# Altium PCB Table Clock.PcbDoc
Units mm, origin at the board's own origin, x right, y up, seen from the top; angles counter-clockwise.
Board outline 80.01 x 59.69 mm, 2 copper layers (Top Layer, Bottom Layer); 41 components, 32 nets, 181 pads, 19 vias.
Unrouted connection lines stored in the file: 57.
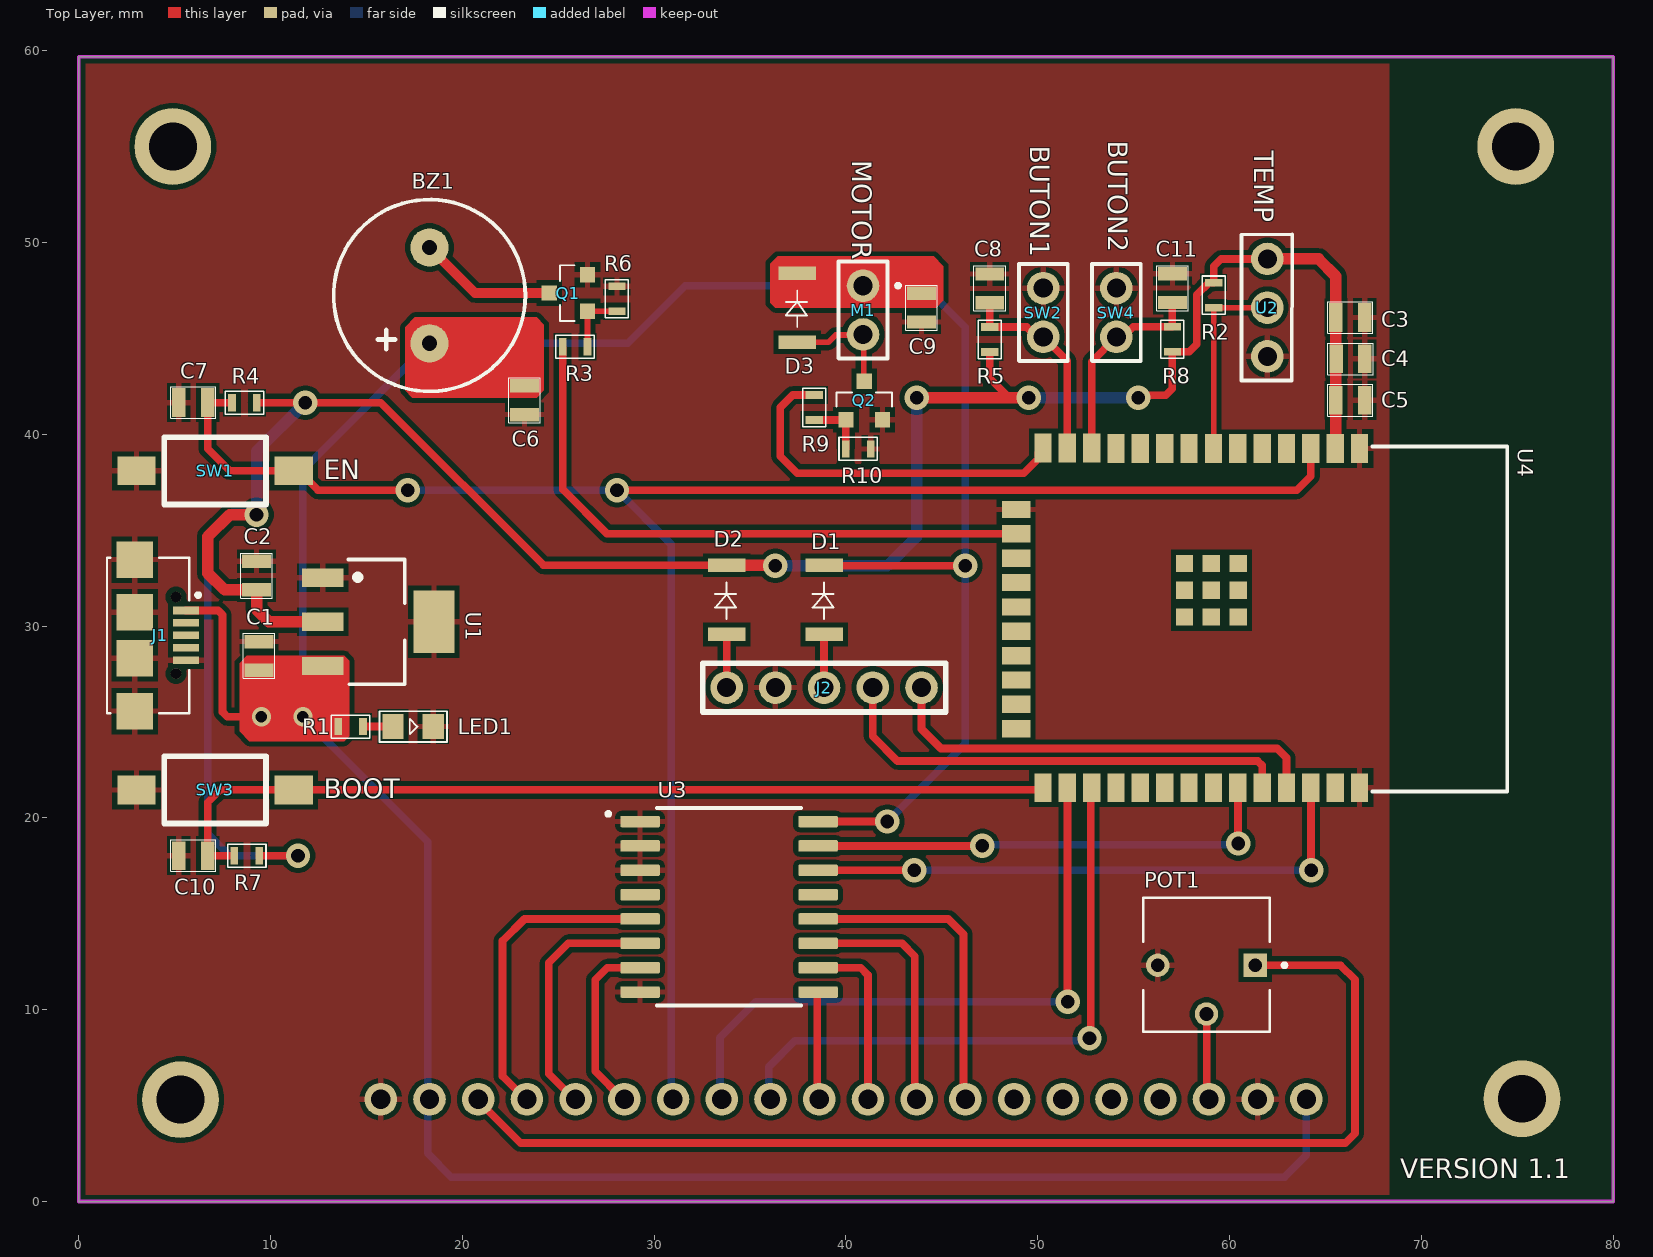
[diagram p0: Top Layer view]
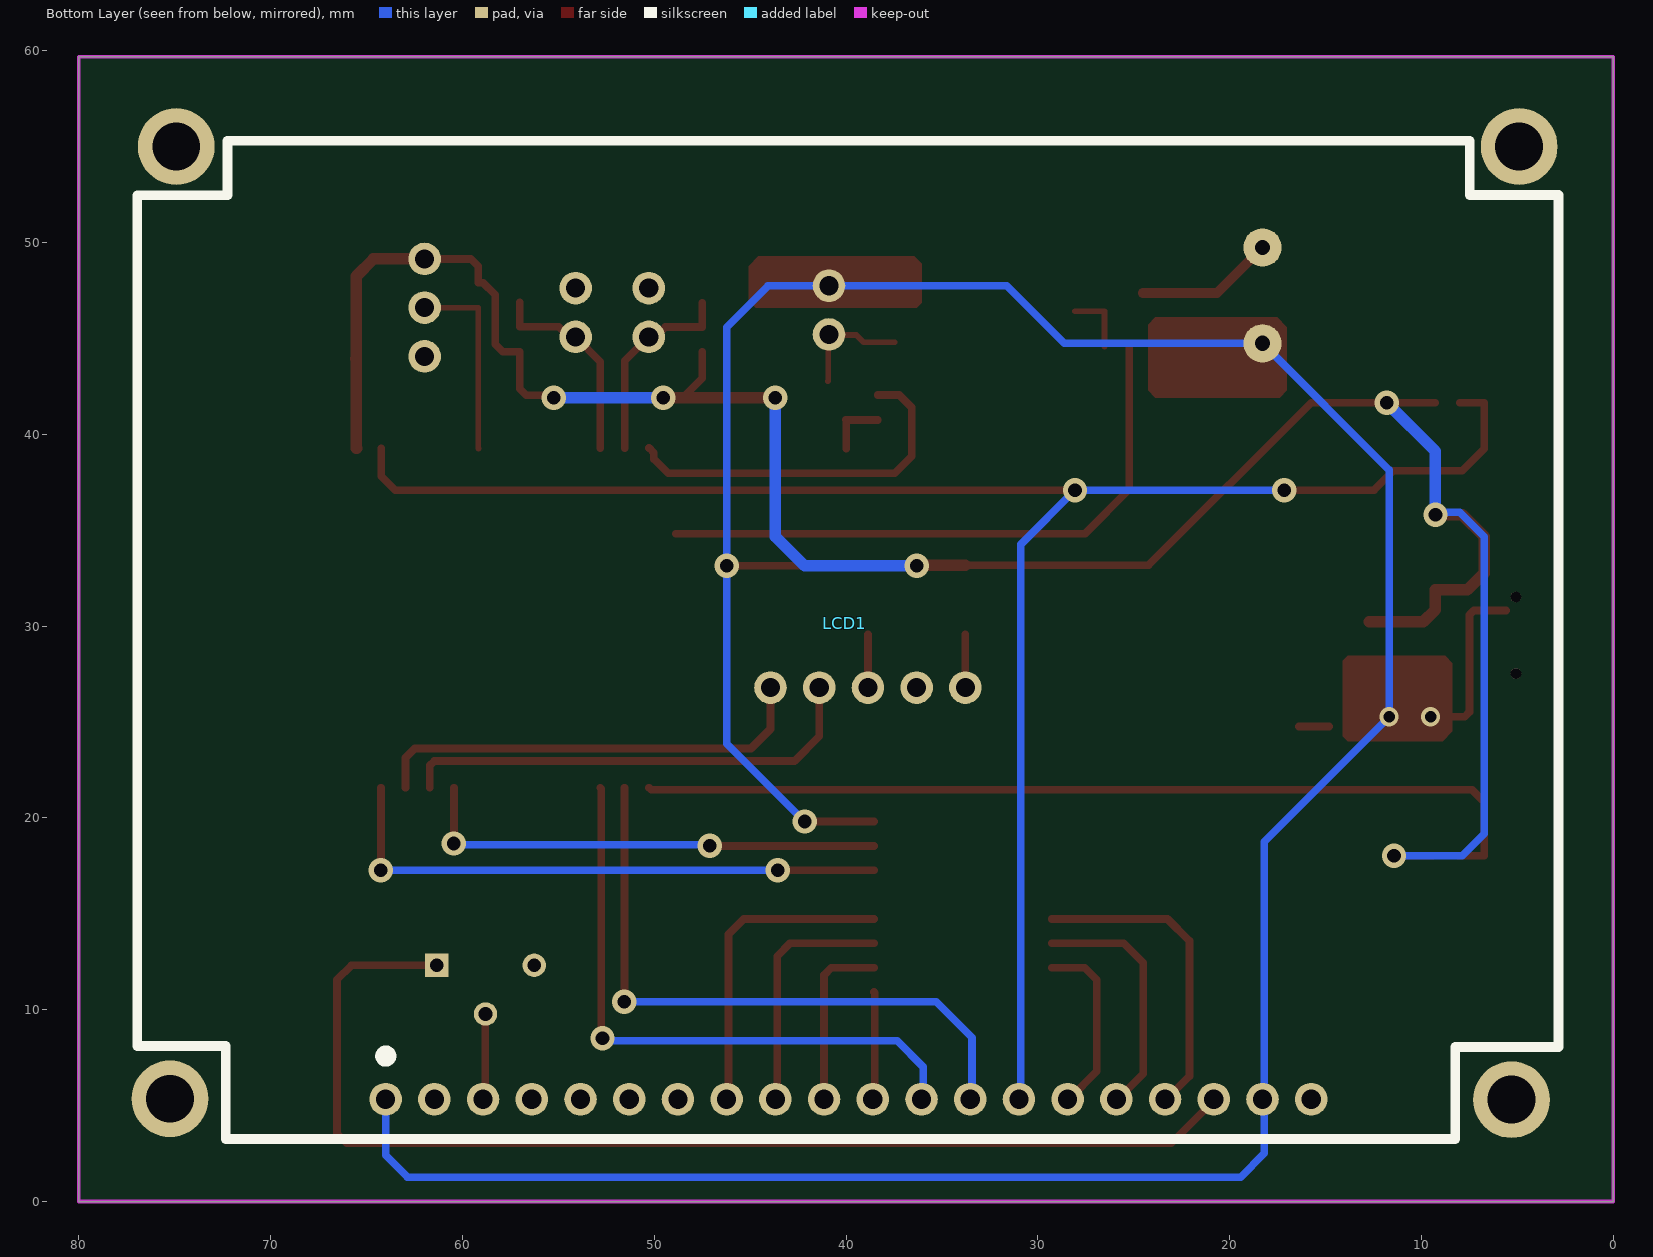
[diagram p1: Bottom Layer view, seen from below]
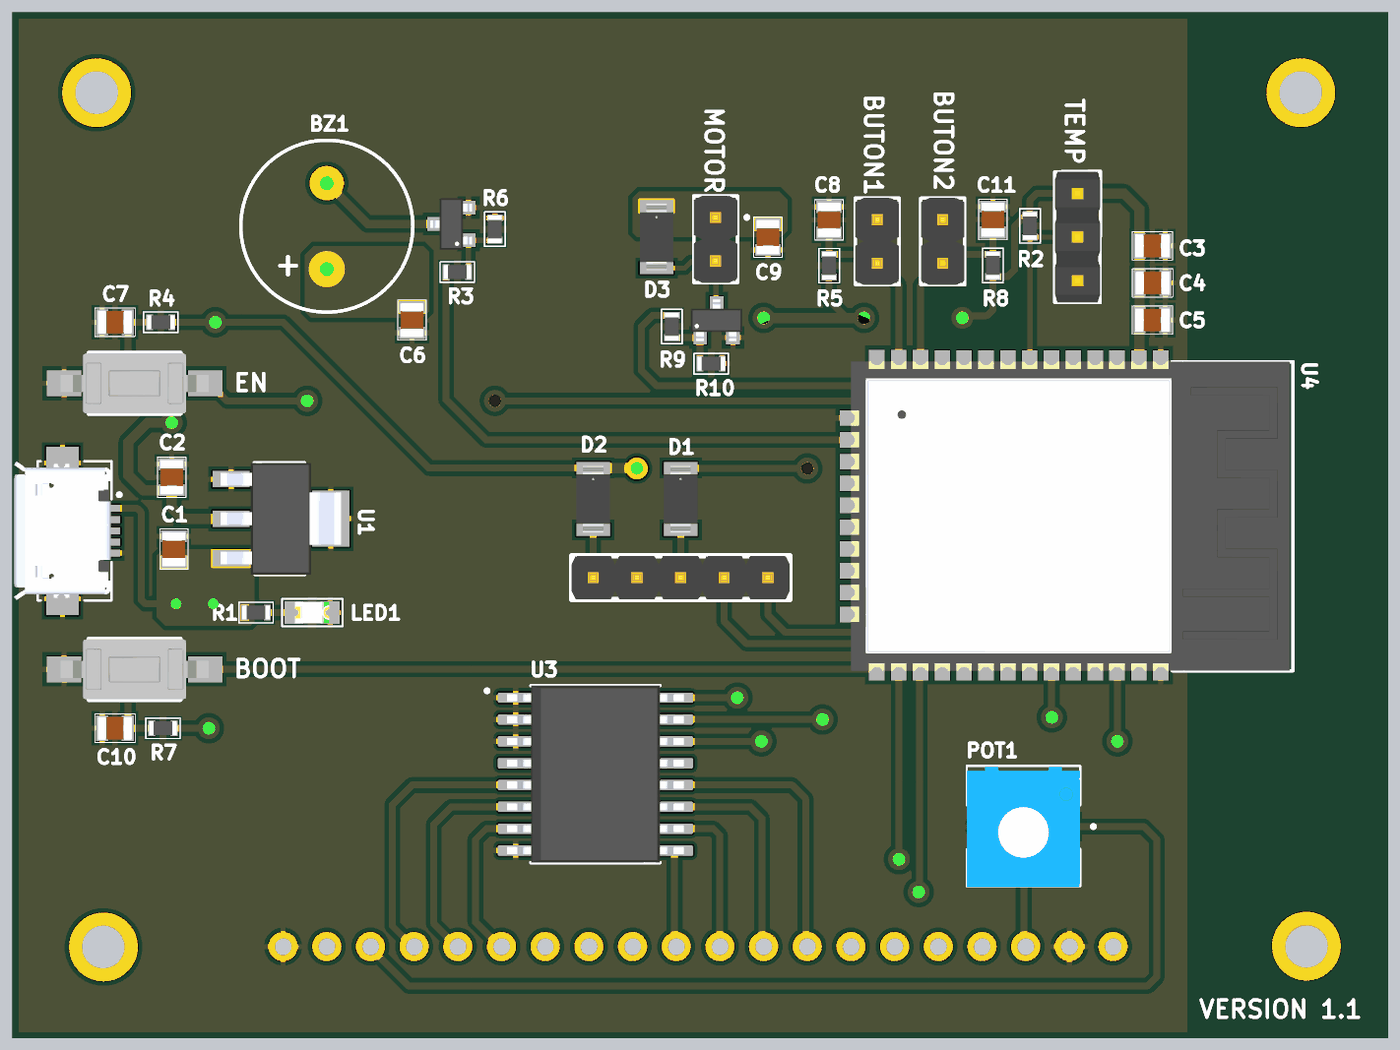
[diagram p2: 3D render of the assembled board from above, using the file's embedded part models]

## Layer stack, top to bottom
Top Solder: solder mask 0.0102, Solder Resist, Dk 3.5
Top Layer: signal copper 0.0356
Dielectric 1: dielectric 0.32, FR-4, Dk 4.8
Bottom Layer: signal copper 0.0356
Bottom Solder: solder mask 0.0102, Solder Resist, Dk 3.5

## Board outline
0,0 80.01,0 80.01,59.69 0,59.69

## Design rules (kind name [scope] priority, off if disabled: settings)
Clearance [All] p1: gap=0.254 ignorepadtopadclearanceinfootprint=FALSE except(0: Arc-SMDPad Arc-Hole Track-SMDPad Track-Hole SMDPad-SMDPad SMDPad-THPad SMDPad-Hole THPad-Hole Via-Hole Fill-Hole Poly-Hole Region-Hole Text-Hole)
PolygonConnect [All] p1: connectstyle=Relief reliefconductorwidth=0.254 reliefentries=4 polygonreliefangle="90 Angle" airgapwidth=0.254
RoutingVias [All] p1: holewidth=0.711 width=1.27 viastyle="Through Hole" minholewidth=0.711 minwidth=1.27 maxholewidth=0.711 maxwidth=1.27
SolderMaskExpansion [All] p1: expansion=0.102 istentingtop=FALSE
Width [All] p1: maxlimit=15 minlimit=0.2 preferedwidth=0.5 minimp=50.000000 maximp=50.000000 favimp=50.000000
30 further rules are at their usual default settings.

## Components (designator, comment, footprint, x,y, rotation, side; value= is the part's Value field where it differs from the comment)
BZ1 "CMI-9605IC-0580T" BUZZER 18.288,47.244 r180 top
C1 "GRM21BR61E226ME44L" "CAP 0805" 9.398,28.448 r270 top value=22uF
C2 "GRM21BR61E226ME44L" "CAP 0805" 9.271,32.639 r270 top value=22uF
C3 "CC0805KKX5R8BB106" "CAP 0805" 66.297,46.098 r180 top value=10uF
C4 "CC0805KKX7R9BB105" "CAP 0805" 66.309,43.939 r180 top value=1uF
C5 "CC0805KRX7R9BB104" "CAP 0805" 66.297,41.78 r180 top value=0.1uF
C6 "CC0805KRX7R9BB104" "CAP 0805" 23.241,41.783 r90 top value=0.1uF
C7 "CC0805KRX7R9BB104" "CAP 0805" 5.969,41.656 r0 top value=0.1uF
C8 "CC0805KRX7R9BB104" "CAP 0805" 47.498,47.613 r270 top value=0.1uF
C9 "CC0805KRX7R9BB104" "CAP 0805" 43.942,46.609 r90 top value=0.1uF
C10 "CC0805KRX7R9BB104" "CAP 0805" 5.969,18.034 r180 top value=0.1uF
C11 "CC0805KRX7R9BB104" "CAP 0805" 57.023,47.625 r270 top value=0.1uF
D1 "MBR230LSFT1G" DIODE 38.862,31.369 r90 top
D2 "MBR230LSFT1G" DIODE 33.782,31.369 r90 top
D3 "MBR230LSFT1G" DIODE 37.465,46.609 r90 top
J1 "UJ2-MIBH-G-SMT-TR" "MICRO USB" 4.259,29.521 r270 top
J2 "61300511121" "HEADER 5 POS" 38.862,26.797 r180 top
LCD1 "NHD-12864WG-BTFH-V#N" "LCD SCREEN" 39.878,5.334 r180 bottom
LED1 "150080RS75000" "LED 0805" 17.349,24.765 r0 top
M1 "HD-EM1003-LW15-R" Motor 40.894,46.482 r270 top
POT1 "3362P-1-103LF" TRIMMER 58.801,12.319 r180 top value=10K
Q1 "SS8050-G" SOT23-3 25.527,47.371 r90 top
Q2 "SS8050-G" SOT23-3 40.955,41.767 r0 top
R1 "CRGH0603J2K0" "RES 0603" 14.174,24.765 r180 top value=2K
R2 "CRGH0603J4K7" "RES 0603" 59.182,47.259 r270 top value=4K7
R3 "CRGH0603J100R" "RES 0603" 25.878,44.576 r0 top value=100R
R4 "CRGH0603J10K" "RES 0603" 8.636,41.656 r0 top value=10K
R5 "CRGH0603J10K" "RES 0603" 47.498,44.946 r270 top value=10K
R6 "CRGH0603J10K" "RES 0603" 28.062,47.071 r270 top value=10K
R7 "CRGH0603J10K" "RES 0603" 8.763,18.034 r0 top value=10K
R8 "CRGH0603J10K" "RES 0603" 57.023,44.958 r270 top value=10K
R9 "CRGH0603J2K0" "RES 0603" 38.354,41.402 r270 top value=2K
R10 "CRGH0603J10K" "RES 0603" 40.64,39.243 r180 top value=10K
SW1 "PTS636SM43SMTR LFS" BUTTON 7.112,38.1 r0 top
SW2 "PTS636SM50 LFS" "HEADER 2 POS" 50.292,46.355 r270 top
SW3 "PTS636SM43SMTR LFS" BUTTON 7.112,21.463 r0 top
SW4 "PTS636SM50 LFS" "HEADER 2 POS" 54.102,46.355 r270 top
U1 "AMS1117-3.3" "SOT 223" 15.621,30.226 r270 top
U2 "DS18B20" "HEADER 3 POS" 61.976,46.609 r90 top
U3 "PCF8574ADWR" SOIC-16 33.909,15.367 r0 top
U4 "ESP32-WROOM-32E-H4" ESP32 57.831,30.435 r270 top value=ESP32-WROOM

## Footprints (in the part's own frame and the unit in brackets; to place one, negate y for a bottom-side part, rotate by r counter-clockwise, add the part's x,y. Pads: shape width x height; smd on the part's side, far side on the other; paste and mask are expansions set on the pad)
BUTTON [mm]
  rect 2x1.5 smd mask+0.05: 1(-4.1,0) 2(4.1,0)
  silkscreen extent -2.65,-1.75 2.65,1.75, body extent -4.3,-1.75 4.3,1.75, height 4.3
BUZZER [mm]
  round 2 hole 0.8 mask+0.05: 1(0,2.5) 2(0,-2.5)
  silkscreen extent -5,-5 5,5, body extent -4.84,-4.78 4.76,6.3, height 5.16
"CAP 0805" [mm]
  rect 0.7x1.5 smd mask+0.05: 1(-0.75,0) 2(0.75,0)
  silkscreen extent -1.17,-0.82 1.17,0.82, body extent -1,-0.67 1,0.67, height 1.22
DIODE [mm]
  rect 0.7x1.95 smd mask+0.102: 1(-1.8,0) 2(1.8,0)
  silkscreen extent -1,-0.5 0.9,0.6, body extent -1.93,-0.98 1.93,0.98, height 1.4
ESP32 [mm]
  rect 1.5x0.9 smd mask+0.05: 1(-8.834,8.951) 2(-8.834,7.681) 3(-8.834,6.411) 4(-8.834,5.141) 5(-8.834,3.871) 6(-8.834,2.601) 7(-8.834,1.331) 8(-8.834,0.061) 9(-8.834,-1.209) 10(-8.834,-2.479) 11(-8.834,-3.749) 12(-8.859,-5.019) 13(-8.859,-6.289) 14(-8.859,-7.559) 25(8.859,-7.559) 26(8.859,-6.289) 27(8.859,-5.019) 28(8.859,-3.749) 29(8.859,-2.479) 30(8.859,-1.209) 31(8.859,0.061) 32(8.859,1.331) 33(8.859,2.601) 34(8.859,3.871) 35(8.859,5.141) 36(8.859,6.411) 37(8.859,7.681) 38(8.859,8.951)
  rect 0.9x1.5 smd mask+0.05: 15(-5.649,-8.951) 16(-4.379,-8.951) 17(-3.109,-8.951) 18(-1.839,-8.951) 19(-0.569,-8.951) 20(0.701,-8.951) 21(1.971,-8.951) 22(3.241,-8.951) 23(4.511,-8.951) 24(5.781,-8.951)
  rect 0.9x0.9 smd mask+0.05: ""(-2.839,1.224) ""(-2.839,2.624) ""(-2.839,-0.176) ""(-1.439,2.624) ""(-1.439,1.224) ""(-1.439,-0.176) ""(-0.039,2.624) ""(-0.039,1.224) ""(-0.039,-0.176)
  silkscreen extent -8.93,9.62 9.05,16.65, body extent -8.94,-9.06 9.06,16.44, height 3.25
"HEADER 2 POS" [mm]
  round 1.7 hole 1 mask+0.05: 1(-1.27,0) 2(1.27,0)
  silkscreen extent -2.52,-1.28 2.52,1.28, body extent -2.54,-1.27 2.54,1.27, height 8.57
"HEADER 3 POS" [mm]
  round 1.7 hole 1 mask+0.05: 1(-2.54,0) 2(0,0) 3(2.54,0)
  silkscreen extent -3.8,-1.3 3.83,1.35, body extent -3.81,-1.29 3.81,1.35, height 8.74
"HEADER 5 POS" [mm]
  round 1.7 hole 1 mask+0.05: 1(-5.08,0) 2(-2.54,0) 3(0,0) 4(2.54,0) 5(5.08,0)
  silkscreen extent -6.35,-1.28 6.32,1.28, body extent -6.35,-1.27 6.35,1.27, height 8.47
"LCD SCREEN" [mm]
  round 1.7 hole 1 mask+0.05: 1(-24.13,0) 2(-21.59,0) 3(-19.05,0) 4(-16.51,0) 5(-13.97,0) 6(-11.43,0) 7(-8.89,0) 8(-6.35,0) 9(-3.81,0) 10(-1.27,0) 11(1.27,0) 12(3.81,0) 13(6.35,0) 14(8.89,0) 15(11.43,0) 16(13.97,0) 17(16.51,0) 18(19.05,0) 19(21.59,0) 20(24.13,0)
  round 4 hole 2.5 mask+0.05: ""(-35.375,0.025) ""(-35.05,49.675) ""(34.575,-0.025) ""(34.975,49.675)
  silkscreen extent -37.08,-2.07 37.02,49.98, body extent -37.53,-2.53 37.47,50.18, height 8.9
"LED 0805" [mm]
  rect 1.1x1.3 smd mask+0.05: 1(-0.966,0) 2(1.134,0)
  silkscreen extent -1.67,-0.8 1.86,0.8, body extent -0.92,-0.63 1.08,0.63, height 0.7
"MICRO USB" [mm]
  rect 0.4x1.35 smd: 1(-1.3,1.338) 2(-0.65,1.338) 3(0,1.338) 4(0.65,1.338) 5(1.3,1.338)
  rect 1.9x1.9 smd: 6(-3.95,-1.338) 7(-1.2,-1.338) 8(1.2,-1.338) 9(3.95,-1.338)
  round 0.55 hole 0.55 unplated: ""(-2,0.813) ""(2,0.813)
  silkscreen extent -4.05,-2.79 4.05,2.06, body extent -4.05,-4.17 4.05,1.48, height 2.65
Motor [mm]
  round 1.7 hole 1 mask+0.05: 1(-1.27,0) 2(1.27,0)
  silkscreen extent -2.52,-1.28 2.52,1.92, body extent -2.54,-1.27 2.54,1.27, height 8.57
"RES 0603" [mm]
  rect 0.4x0.9 smd mask+0.05: 1(-0.65,0) 2(0.65,0)
  silkscreen extent -1,-0.6 1,0.6, body extent -0.8,-0.4 0.8,0.4, height 0.55
SOIC-16 [mm]
  rrect25% 2.06x0.6 smd: 1(-4.64,4.445) 2(-4.64,3.175) 3(-4.64,1.905) 4(-4.64,0.635) 5(-4.64,-0.635) 6(-4.64,-1.905) 7(-4.64,-3.175) 8(-4.64,-4.445) 9(4.64,-4.445) 10(4.64,-3.175) 11(4.64,-1.905) 12(4.64,-0.635) 13(4.64,0.635) 14(4.64,1.905) 15(4.64,3.175) 16(4.64,4.445)
  silkscreen extent -6.4,-5.15 3.75,5.15, body extent -5.15,-5.15 5.15,5.15, height 2.65
SOT23-3 [mm]
  rect 0.8x0.8 smd mask+0.05: 1(-0.95,-1) 2(0.95,-1) 3(0,1)
  silkscreen extent -1.45,-0.33 1.45,0.43, body extent -1.5,-1.21 1.5,1.21, height 1.12
"SOT 223" [mm]
  rect 0.95x2.15 smd mask+0.102: 1(-2.3,-2.9) 2(0,-2.9) 3(2.3,-2.9)
  rect 3.25x2.15 smd mask+0.102: 1(0,2.9)
  silkscreen extent -3.25,-1.55 3.25,1.38, body extent -3.25,-3.5 3.25,3.5, height 1.8
TRIMMER [mm]
  rect 1.222x1.222 hole 0.714: 1(-2.54,0)
  round 1.222 hole 0.714: 2(0,2.54) 3(2.54,0)
  silkscreen extent -4.16,-3.53 3.3,3.47, body extent -3.3,-3.49 3.3,3.49, height 4.88

## Part data
BZ1: library part BUZZER, "BUZZER MAGNETIC 5V 9.6MM TH"
C1 C2: library part "CAP CER 22UF 0805", "CAP CER 22UF 25V X5R 0805"
C3: library part "CAP CER 10UF 0805", "CAP CER 10UF 25V X5R 0805"
C4: library part "CAP CER 1UF 0805", "CAP CER 1UF 50V X7R 0805"
C5 C6 C7 C8 C9 C10 C11: library part "CAP CER 0.1UF 0805", "CAP CER 0.1UF 50V X7R 0805"
D1 D2 D3: library part "DIODE SMD", "DIODE SCHOTTKY 30V 2A"
J1: library part "MICRO USB", "USB JACK 2.0 MICRO B TYPE 5 P"
J2: library part "HEADER 5 POS", "CONN HEADER 5POS 2.54MM"
LCD1: library part "LCD SCREEN", "GRAPHIC DISPLAY LCD TH"
LED1: library part "RED LED 0805", "LED RED 0805 SMD"
M1: library part "VIBRATION DC MOTOR", "HD MOTOR 3VDC 46OHM 12000RPM"
POT1: library part TRIMMER, "TRIMMER 10K OHM 0.5W PC PIN TOP"
Q1 Q2: library part "NPN TRANSISTOR", "TRANS NPN 25V 1.5A SOT-23-3"
R1 R9: library part "RES 2K OHM 0603", "RES 2K OHM 5% 1/5W 0603"
R2: library part "RES 4K7 OHM 0603", "RES 4.7K OHM 5% 1/5W 0603"
R3: library part "RES 100 OHM 0603", "RES 100 OHM 5% 1/5W 0603"
R4 R5 R6 R7 R8 R10: library part "RES 10K OHM 0603", "RES 10K OHM 5% 1/5W 0603"
SW1 SW3: library part BUTTON, "SWITCH TACTILE 0.05A 12V"
SW2 SW4: library part "USER BUTTON", "SWITCH TACTILE 0.05A 12V"
U1: library part "LDO REG 3V3 1A", "IC LDO REG 3.3V 1A SOT223 SMD"
U2: library part "TEMPATURE SENSOR", "SENSOR DIGITAL -55C-125C TO92-3"
U3: library part "I2C CONVERTER", "IC XPNDR 100KHZ I2C 16SOIC"
U4: library part ESP32-WROOM, "RF TXRX MOD BT WIFI TH SMD"

## Via types
v1: diameter 1.27, hole 0.711, Top Layer to Bottom Layer, tented both sides, 16 vias
v2: diameter 1, hole 0.6, Top Layer to Bottom Layer, tented both sides, 2 vias
v3: diameter 1.27, hole 0.711, Top Layer to Bottom Layer, 1 vias

## Nets (pads, with @x,y where several pads share a name; then routed paths per layer and width w, separated by ;. In a path a pad name is that pad's centre, name@x,y a point inside that pad or via, vN(x,y) a via of type N, cw(c..) or ccw(c..) an arc to the next point about the centre after c; other vN are vias at no path point)
3V3: C2.2 C3.2 C4.2 C5.2 D2.2 R2.1 R4.2 R5.2 R7.2 R8.2 U1.2 U2.3 U4.2 | length 131.2
  Top Layer w0.4: R4.2 15.748,41.656 24.235,33.169 D2.2 ; R7.2 v1(11.43,18.034) ; R5.2 47.498,42.926 48.514,41.91 ; v1(55.245,41.91) 55.373,42.038 56.672,42.038 57.023,42.39 R8.2 57.897,44.308 58.293,44.704 58.293,47.27 58.932,47.909 R2.1 59.182,48.768 59.563,49.149 U2.3
  Top Layer w0.6: v1(9.271,35.814) 7.874,35.814 6.731,34.671 6.731,32.766 7.608,31.889 C2.2 9.271,30.861 9.906,30.226 U1.2 ; D2.2 36.3,33.169 v3(36.322,33.147) ; v1(43.688,41.91) 48.514,41.91 v1(49.53,41.91) ; U2.3 64.643,49.149 65.547,48.245 C3.2 65.553,46.092 65.553,43.945 C4.2 65.553,43.933 65.553,41.786 C5.2 65.53,41.763 65.53,39.286 U4.2
  Bottom Layer w0.4: v1(9.271,35.814) 9.144,35.941 8.001,35.941 6.731,34.671 6.731,19.177 7.874,18.034 v1(11.43,18.034)
  Bottom Layer w0.6: v1(9.271,35.814) 9.271,39.116 v1(11.811,41.656) ; v3(36.322,33.147) 42.164,33.147 43.688,34.671 v1(43.688,41.91) ; v1(49.53,41.91) v1(55.245,41.91)
5V: BZ1.1 C1.2 C6.2 C9.2 D1.2 D3.2 J1.1 LCD1.1 LCD1.19 M1.1 R1.2 U1.3 U3.16 | length 175.2
  Top Layer w0.4: J1.1 7.259,30.821 7.493,30.587 7.493,25.527 7.747,25.273 v2(9.525,25.273) ; U3.16 v1(42.164,19.812) ; D1.2 38.873,33.158 46.217,33.158 v1(46.228,33.147)
  Bottom Layer w0.4: v1(42.164,19.812) 46.228,23.876 v1(46.228,33.147) 46.228,45.593 44.069,47.752 M1.1 31.623,47.752 28.615,44.744 BZ1.1 11.684,38.14 v2(11.684,25.273) 18.192,18.765 18.192,5.359 18.192,2.509 19.431,1.27 62.865,1.27 64.008,2.413 64.008,5.263 LCD1.1@63.912,5.359
BUTON1: C8.2 R5.1 SW2.2 U4.13 | length 10.6
  Top Layer w0.4: C8.2 R5.1 49.429,45.596 49.94,45.085 SW2.2 51.542,43.835 U4.13
BUTON2: C11.2 R8.1 SW4.2 U4.12 | length 10.7
  Top Layer w0.4: U4.12 52.812,43.795 SW4.2 54.454,45.085 54.977,45.608 R8.1 C11.2
BUZZER: R3.1 U4.16 | length 32.1
  Top Layer w0.4: R3.1 25.228,37.129 27.543,34.814 U4.16
CS1: LCD1.12 U4.27 | length 32.1
  Top Layer w0.4: v1(52.705,8.509) 52.759,8.563 52.759,21.523 U4.27
  Bottom Layer w0.4: LCD1.12@35.972,5.359 35.972,7.016 37.338,8.382 52.578,8.382 v1(52.705,8.509)
CS2: LCD1.13 U4.26 | length 33.3
  Top Layer w0.4: U4.26 51.552,21.567 51.552,10.424 v1(51.562,10.414)
  Bottom Layer w0.4: LCD1.13@33.432,5.359 33.432,8.54 35.306,10.414 v1(51.562,10.414)
D/I: LCD1.16 U3.6 | length 12.8
  Top Layer w0.4: LCD1.16@25.812,5.359 24.511,6.66 24.511,12.446 25.527,13.462 U3.6
DB4: LCD1.8 U3.12 | length 16.5
  Top Layer w0.4: U3.12 45.339,14.732 46.132,13.939 LCD1.8@46.132,5.359
DB5: LCD1.9 U3.11 | length 12.8
  Top Layer w0.4: U3.11 42.926,13.462 43.592,12.796 LCD1.9@43.592,5.359
DB6: LCD1.10 U3.10 | length 9.2
  Top Layer w0.4: U3.10 40.767,12.192 41.148,11.811 41.148,5.455 LCD1.10@41.052,5.359
DB7: LCD1.11 U3.9 | length 5.6
  Top Layer w0.4: LCD1.11@38.512,5.359 38.512,10.885 U3.9
E: LCD1.17 U3.5 | length 16.4
  Top Layer w0.4: LCD1.17@23.272,5.359 22.098,6.533 22.098,13.589 23.241,14.732 U3.5
EN: C7.2 LCD1.14 R4.1 SW1.2 U4.3 | length 96.7
  Top Layer w0.4: R4.1 C7.2 6.719,39.255 7.874,38.1 11.462,38.1 12.478,37.084 v1(17.145,37.084) ; v1(28.067,37.084) 63.5,37.084 64.242,37.826 U4.3
  Bottom Layer w0.4: v1(17.145,37.084) v1(28.067,37.084) 30.892,34.259 LCD1.14@30.892,5.359
GND: C1.1 C2.1 C3.1 C4.1 C5.1 C6.1 C7.1 C8.1 C9.1 C10.2 C11.1 J1.5 J1.6 J1.7 J1.8 J1.9 J2.4 LCD1.2 LCD1.20 LED1.2 POT1.3 Q1.2 Q2.2 R6.1 R10.1 SW1.1 SW2.1 SW3.1 SW4.1 U1.1 U2.1 U3.1 U3.2 U3.3 U3.8 U4.1 U4.15 U4.38
IO0: C10.1 R7.1 SW3.2 U4.25 | length 48
  Top Layer w0.4: R7.1 C10.1 6.719,20.816 7.366,21.463 SW3.2 50.159,21.463 U4.25
MOTOR: R9.1 U4.14 | length 19.4
  Top Layer w0.4: R9.1 37.226,42.052 36.576,41.402 36.576,38.862 37.465,37.973 49.276,37.973 50.022,38.719 50.022,39.044 U4.14
NetBZ1_2: BZ1.2 Q1.3 | length 7.2
  Top Layer w0.5: BZ1.2 20.661,47.371 Q1.3
NetD1_1: D1.1 J2.3 | length 2.8
  Top Layer w0.4: J2.3 D1.1
NetD2_1: D2.1 J2.5 | length 2.8
  Top Layer w0.4: J2.5 D2.1
NetD3_1: D3.1 M1.2 Q2.3 | length 6.1
  Top Layer w0.3: D3.1 39.094,44.809 39.467,45.182 40.864,45.182 M1.2 40.925,45.181 40.925,42.798 Q2.3
NetLCD1_3: LCD1.3 POT1.2 | length 4.4
  Top Layer w0.4: POT1.2 58.816,9.764 58.816,5.375 LCD1.3@58.832,5.359
NetLED1_1: LED1.1 R1.1 | length 1.6
  Top Layer w0.4: R1.1 LED1.1
NetQ1_1: Q1.1 R3.2 R6.2 | length 3.4
  Top Layer w0.3: R3.2 Q1.1 R6.2
NetQ2_1: Q2.1 R9.2 R10.2 | length 3.2
  Top Layer w0.4: R9.2 Q2.1@39.99,40.752 ; R10.2 Q2.1@39.99,40.752 ; Q2.1 Q2.1@39.99,40.752
R/W: LCD1.15 U3.7 | length 9.4
  Top Layer w0.4: LCD1.15@28.352,5.359 26.924,6.787 26.924,11.557 27.559,12.192 U3.7
RXD0: J2.2 U4.34 | length 24.6
  Top Layer w0.4: J2.2 41.402,24.257 42.691,22.968 61.468,22.968 61.702,22.734 U4.34
SCL: U3.14 U4.36 | length 30
  Top Layer w0.4: U3.14 v1(43.561,17.272) ; U4.36 64.252,21.567 64.252,17.282 v1(64.262,17.272)
  Bottom Layer w0.4: v1(43.561,17.272) v1(64.262,17.272)
SDA: U3.15 U4.33 | length 24.9
  Top Layer w0.4: U3.15 v1(47.117,18.542) ; U4.33 60.442,21.567 60.442,18.679 v1(60.452,18.669)
  Bottom Layer w0.4: v1(47.117,18.542) 47.18,18.605 60.389,18.605 v1(60.452,18.669)
TEMPATURE: R2.2 U2.2 U4.7 | length 10.1
  Top Layer w0.3: U4.7 59.182,39.289 R2.2 U2.2
TXD0: J2.1 U4.35 | length 23.4
  Top Layer w0.4: J2.1 43.942,24.638 44.958,23.622 62.484,23.622 62.972,23.134 U4.35
VEE: LCD1.18 POT1.1 | length 60.5
  Top Layer w0.4: LCD1.18@20.732,5.359 23.043,3.048 66.04,3.048 66.548,3.556 66.548,11.557 65.786,12.319 POT1.1
pads on no net: J1. J1.2 J1.3 J1.4 LCD1. LCD1.4 LCD1.5 LCD1.6 LCD1.7 U3.4 U3.13 U4. U4.4 U4.5 U4.6 U4.8 U4.9 U4.10 U4.11 U4.17 U4.18 U4.19 U4.20 U4.21 U4.22 U4.23 U4.24 U4.28 U4.29 U4.30 U4.31 U4.32 U4.37

## Polygon pours and split planes (outlines as drawn)
GND on Top Layer "GND_L01_P000" (solid, remove dead copper, pour order 0): 0.127,59.563 68.326,59.563 68.326,0.127 0.127,0.127

## Keep-outs
Keep-Out Layer:
  the board outline again, w0.2

## Other copper
Top Layer:
  region net 5V: 36.068,48.895 36.068,46.863 36.322,46.609 44.704,46.609 45.085,46.99 45.085,48.768 44.577,49.276 36.449,49.276
  region net 5V: 8.382,28.067 8.763,28.448 13.843,28.448 14.097,28.194 14.097,24.257 13.843,24.003 8.89,24.003 8.382,24.511 8.382,27.94
  region net 5V: 17.018,45.593 17.526,46.101 23.876,46.101 24.257,45.72 24.257,42.291 23.876,41.91 17.399,41.91 17.018,42.291

## Silkscreen, mask and mechanical layers (free items; w line width, h text height)
Top Overlay:
  text "BUTON2" at 53.667,55.299 h1 r270
  text "BUTON1" at 49.603,55.045 h1 r270
  text "TEMP" at 61.287,54.791 h1 r270
  text "MOTOR" at 40.332,54.283 h1 r270
  text "EN" at 12.773,37.665 h1
  text "BOOT" at 12.773,21.028 h1
  text "VERSION 1.1" at 68.907,1.216 h1